# EAGLE board AND_Gate (EAGLE 9.2.2)
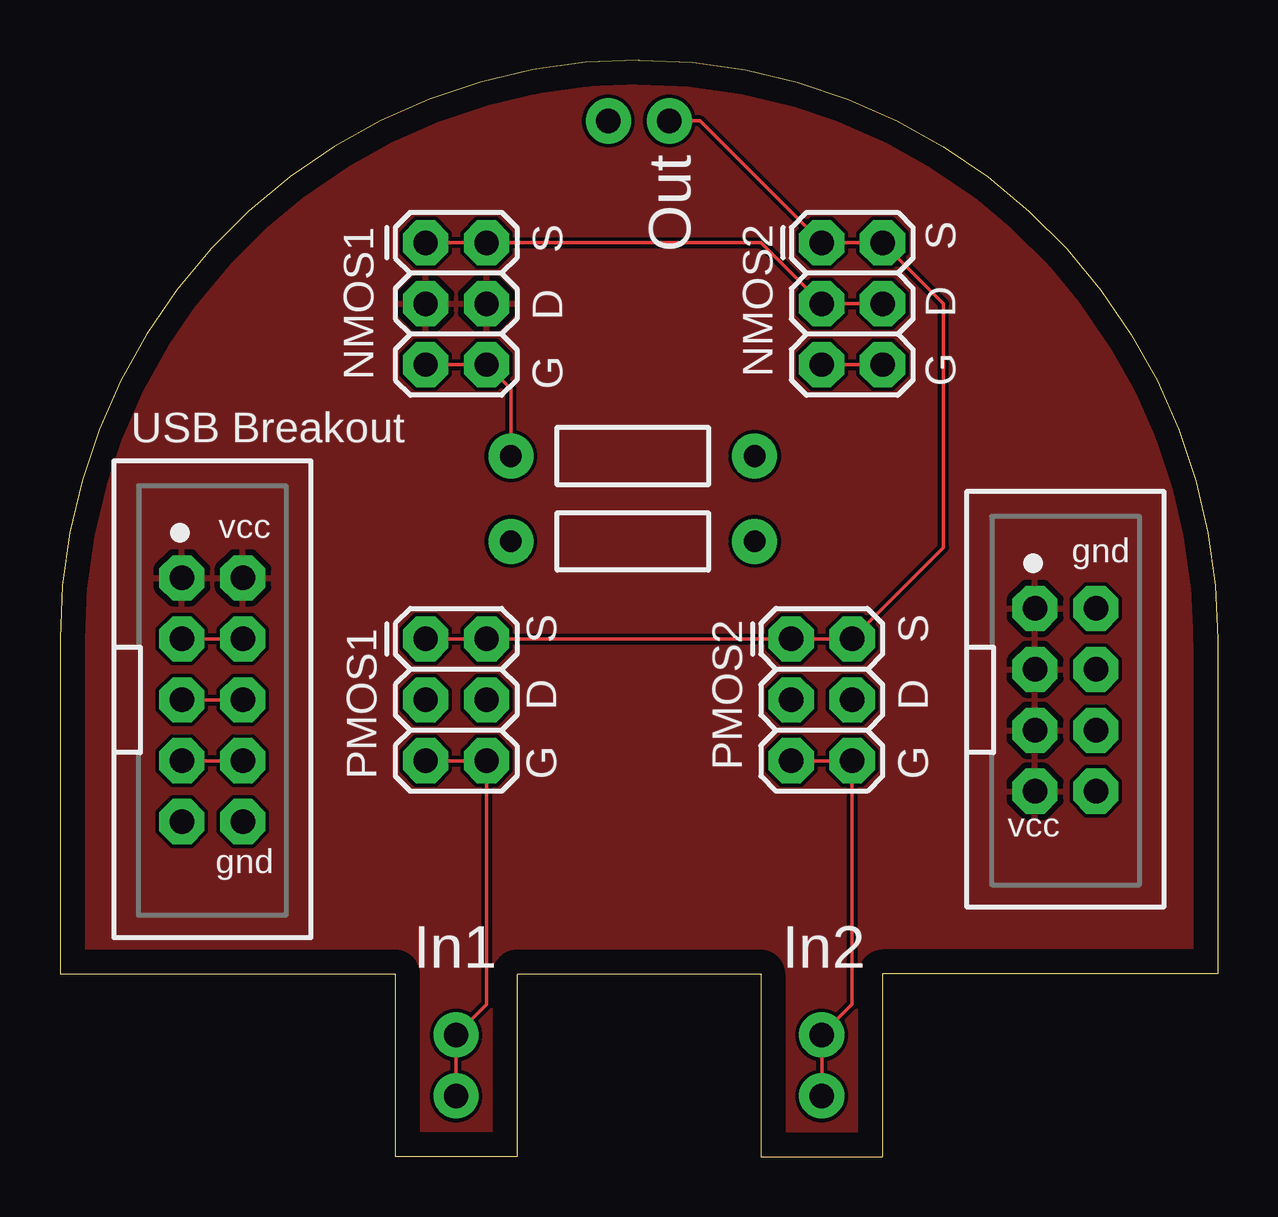
[diagram p0: board, top side]
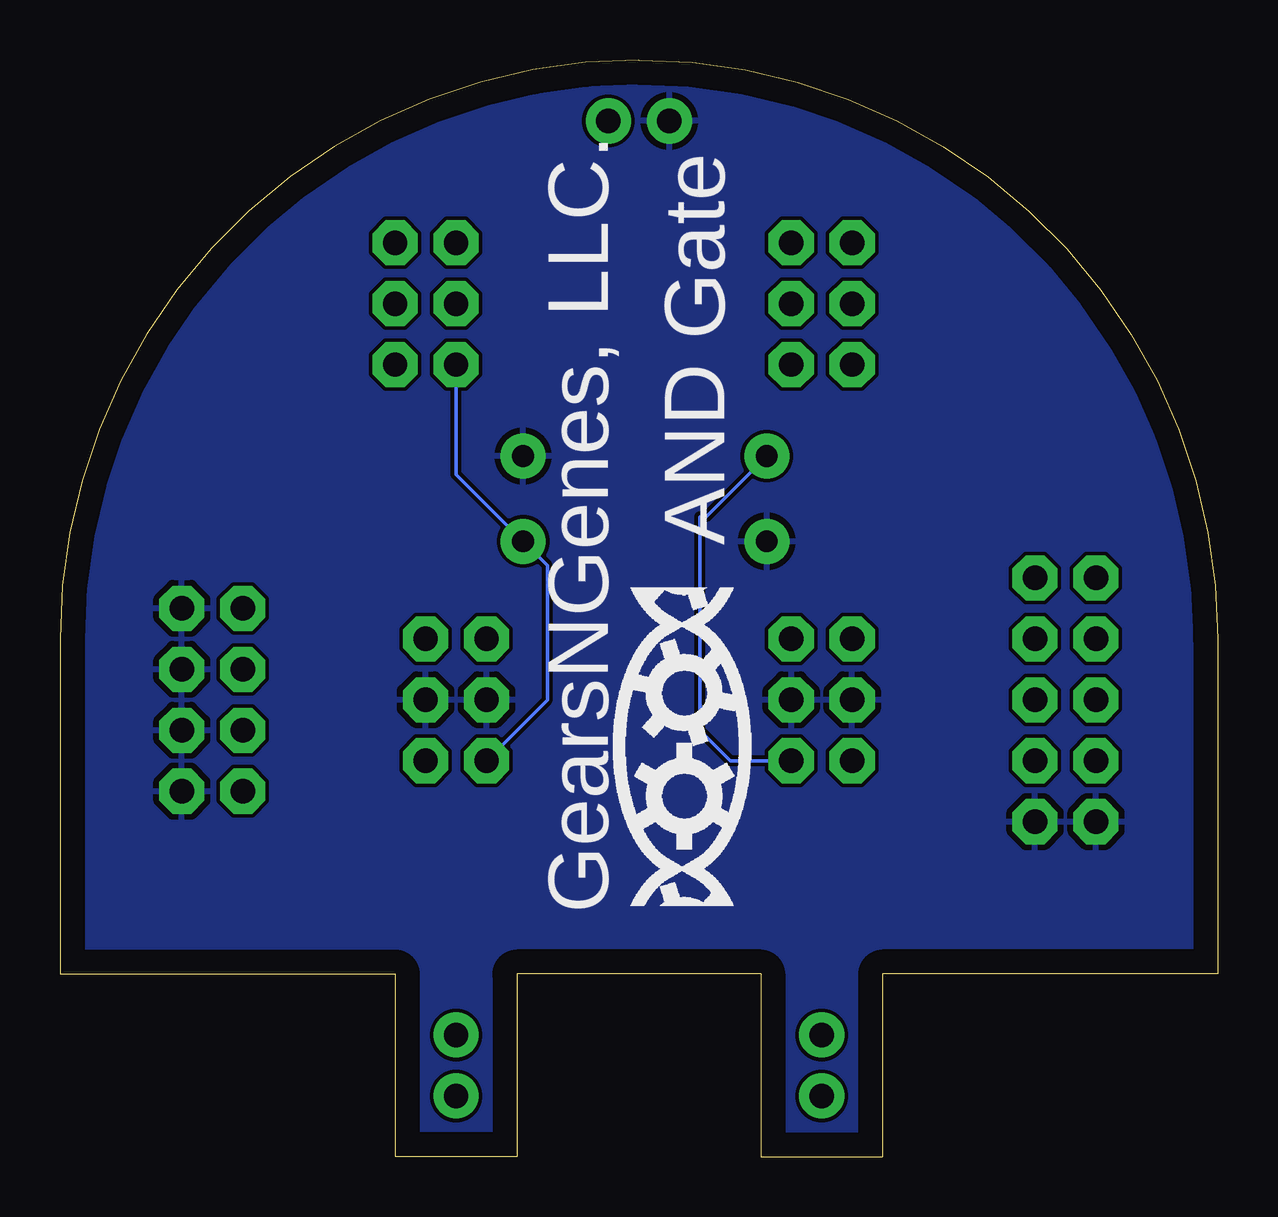
[diagram p1: board, bottom side, seen from below]

Size 48.26 x 45.72 mm. Coordinates in mm from the lower left corner, seen from the top.
Outline: 24.13,45.72 arc-90 48.26,21.59 48.26,7.62 34.29,7.62 34.29,0 29.21,0 29.21,7.62 19.05,7.62 19.05,0 13.97,0 13.97,7.62 0,7.62 0,21.59 arc-90 24.13,45.72
Copper layers (1*16): Top 0.035mm / dielectric 1.5mm / Bottom 0.035mm
Design rules "default": minimum track width 6mil, minimum drill 0.35mm, track to track 6mil, track to pad 6mil, pad to pad 6mil, via to via 6mil, smd to smd 6mil, copper to edge 40mil, drill to drill 6mil, minimum pad ring 10mil, minimum via ring 8mil, stop-mask expansion 4mil, vias tented up to drill 0mil, thermal gap 10mil

## Footprints (pad centres in the part's own frame; a part is rotated, then mirrored left to right if it is on the bottom)
2X5-SHROUDED = drill 1.016 pad 1.88 octagon: 1 -5.08,-1.27; 2 -5.08,1.27; 3 -2.54,-1.27; 4 -2.54,1.27; 5 0,-1.27; 6 0,1.27; 7 2.54,-1.27; 8 2.54,1.27; 9 5.08,-1.27; 10 5.08,1.27
1X02_NO_SILK = drill 1.016 pad 1.88: 1 0,0; 2 2.54,0
2X4-SHROUDED = drill 1.016 pad 1.88 octagon: 1 -3.81,-1.27; 2 -3.81,1.27; 3 -1.27,-1.27; 4 -1.27,1.27; 5 1.27,-1.27; 6 1.27,1.27; 7 3.81,-1.27; 8 3.81,1.27
2X3 = drill 1.016 pad 1.88 octagon: 1 0,0; 2 0,2.54; 3 2.54,0; 4 2.54,2.54; 5 5.08,0; 6 5.08,2.54
AXIAL-0.4 = drill 0.9 pad 1.88: P$1 -5.08,0; P$2 5.08,0

## Placement (x,y rotation side)
J1  [2X5-SHROUDED]  6.35,19.05 270 top
J2  [1X02_NO_SILK]  22.86,43.18 0 top
J3  [1X02_NO_SILK]  31.75,5.08 270 top
J4  [1X02_NO_SILK]  16.51,5.08 270 top
J5  [2X4-SHROUDED]  41.91,19.05 270 top
JP1  N_MOS1  [2X3]  15.24,38.1 270 top
JP2  N_MOS2  [2X3]  31.75,38.1 270 top
JP3  P_MOS1  [2X3]  15.24,21.59 270 top
JP4  P_MOS2  [2X3]  30.48,21.59 270 top
R1  [AXIAL-0.4]  23.88,29.21 180 top
R2  [AXIAL-0.4]  23.88,25.65 0 top

## Library data of the parts
J1-J5 R1 R2 = MG-Eagle_v1
JP1-JP4 = MG-Eagle_v1; PROD_ID: CONN-11566

## Nets
GND: J1.9 J1.10 J2.1 J5.2 J5.4 J5.6 J5.8 JP3.3 JP3.4 JP4.3 JP4.4 R1.P$1 R2.P$1
N$1: J1.7 J1.8
N$2: J1.5 J1.6
N$3: J1.3 J1.4
N$4: JP1.1 JP1.2 JP2.3 JP2.4
N$6: J4.1 J4.2 JP1.5 JP1.6 JP3.5 JP3.6 R1.P$2
N$10: J2.2 JP2.1 JP2.2 JP3.1 JP3.2 JP4.1 JP4.2
N$16: J3.1 J3.2 JP2.5 JP2.6 JP4.5 JP4.6 R2.P$2
VCC: J1.1 J1.2 J5.1 J5.3 J5.5 J5.7 JP1.3 JP1.4

## Tracks (layer width: path | path; a pad name or v marks a point on that pad's centre or on a via)
GND
  pour Bottom: -68.22,65.15 86.72,65.15 87.99,63.88 87.99,-36.02 -72.06,-36.02 -72.06,61.32
N$1
  Top 0.152: J1.8 J1.7
N$2
  Top 0.152: J1.5 J1.6
N$3
  Top 0.152: J1.4 J1.3
N$4
  Top 0.152: JP1.1 JP1.2 29.21,38.1 JP2.3 JP2.4
N$6
  Top 0.152: JP1.5 JP1.6 18.8,32 R1.P$2 | JP3.5 JP3.6 17.78,6.35 J4.1 J4.2
  Bottom 0.152: JP3.6 20.32,16.51 21.59,17.78 21.59,26.67 21.34,26.67 R1.P$2
N$10
  Top 0.152: JP3.1 JP3.2 JP4.1 JP4.2 36.83,25.4 36.83,35.56 JP2.2 JP2.1 26.67,43.18 J2.2
N$16
  Top 0.152: JP4.5 JP4.6 33.02,6.35 J3.1 J3.2 | JP2.5 JP2.6
  Bottom 0.152: JP4.5 27.94,19.05 27.94,24.64 R2.P$2 31.75,28.45 JP2.5
VCC
  pour Top: -73.25,65.15 87.99,65.15 87.99,-40.06 -73.25,-40.06

## Text on the board
tPlace: Out | NMOS1 | G D S | NMOS2 | G D S | USB Breakout | vcc | gnd | PMOS1 | G D S | PMOS2 | G D S | vcc | gnd | In1 | In2
bPlace: AND Gate | GearsNGenes, LLC.